# Altium PCB BigDriver.PcbDoc
Units mm, origin at the board's own origin, x right, y up, seen from the top; angles counter-clockwise.
Board outline 56.43 x 56.43 mm, 2 copper layers (Top Layer, Bottom Layer), stack 2.071 mm thick; 63 components, 58 nets, 245 pads, 152 vias.
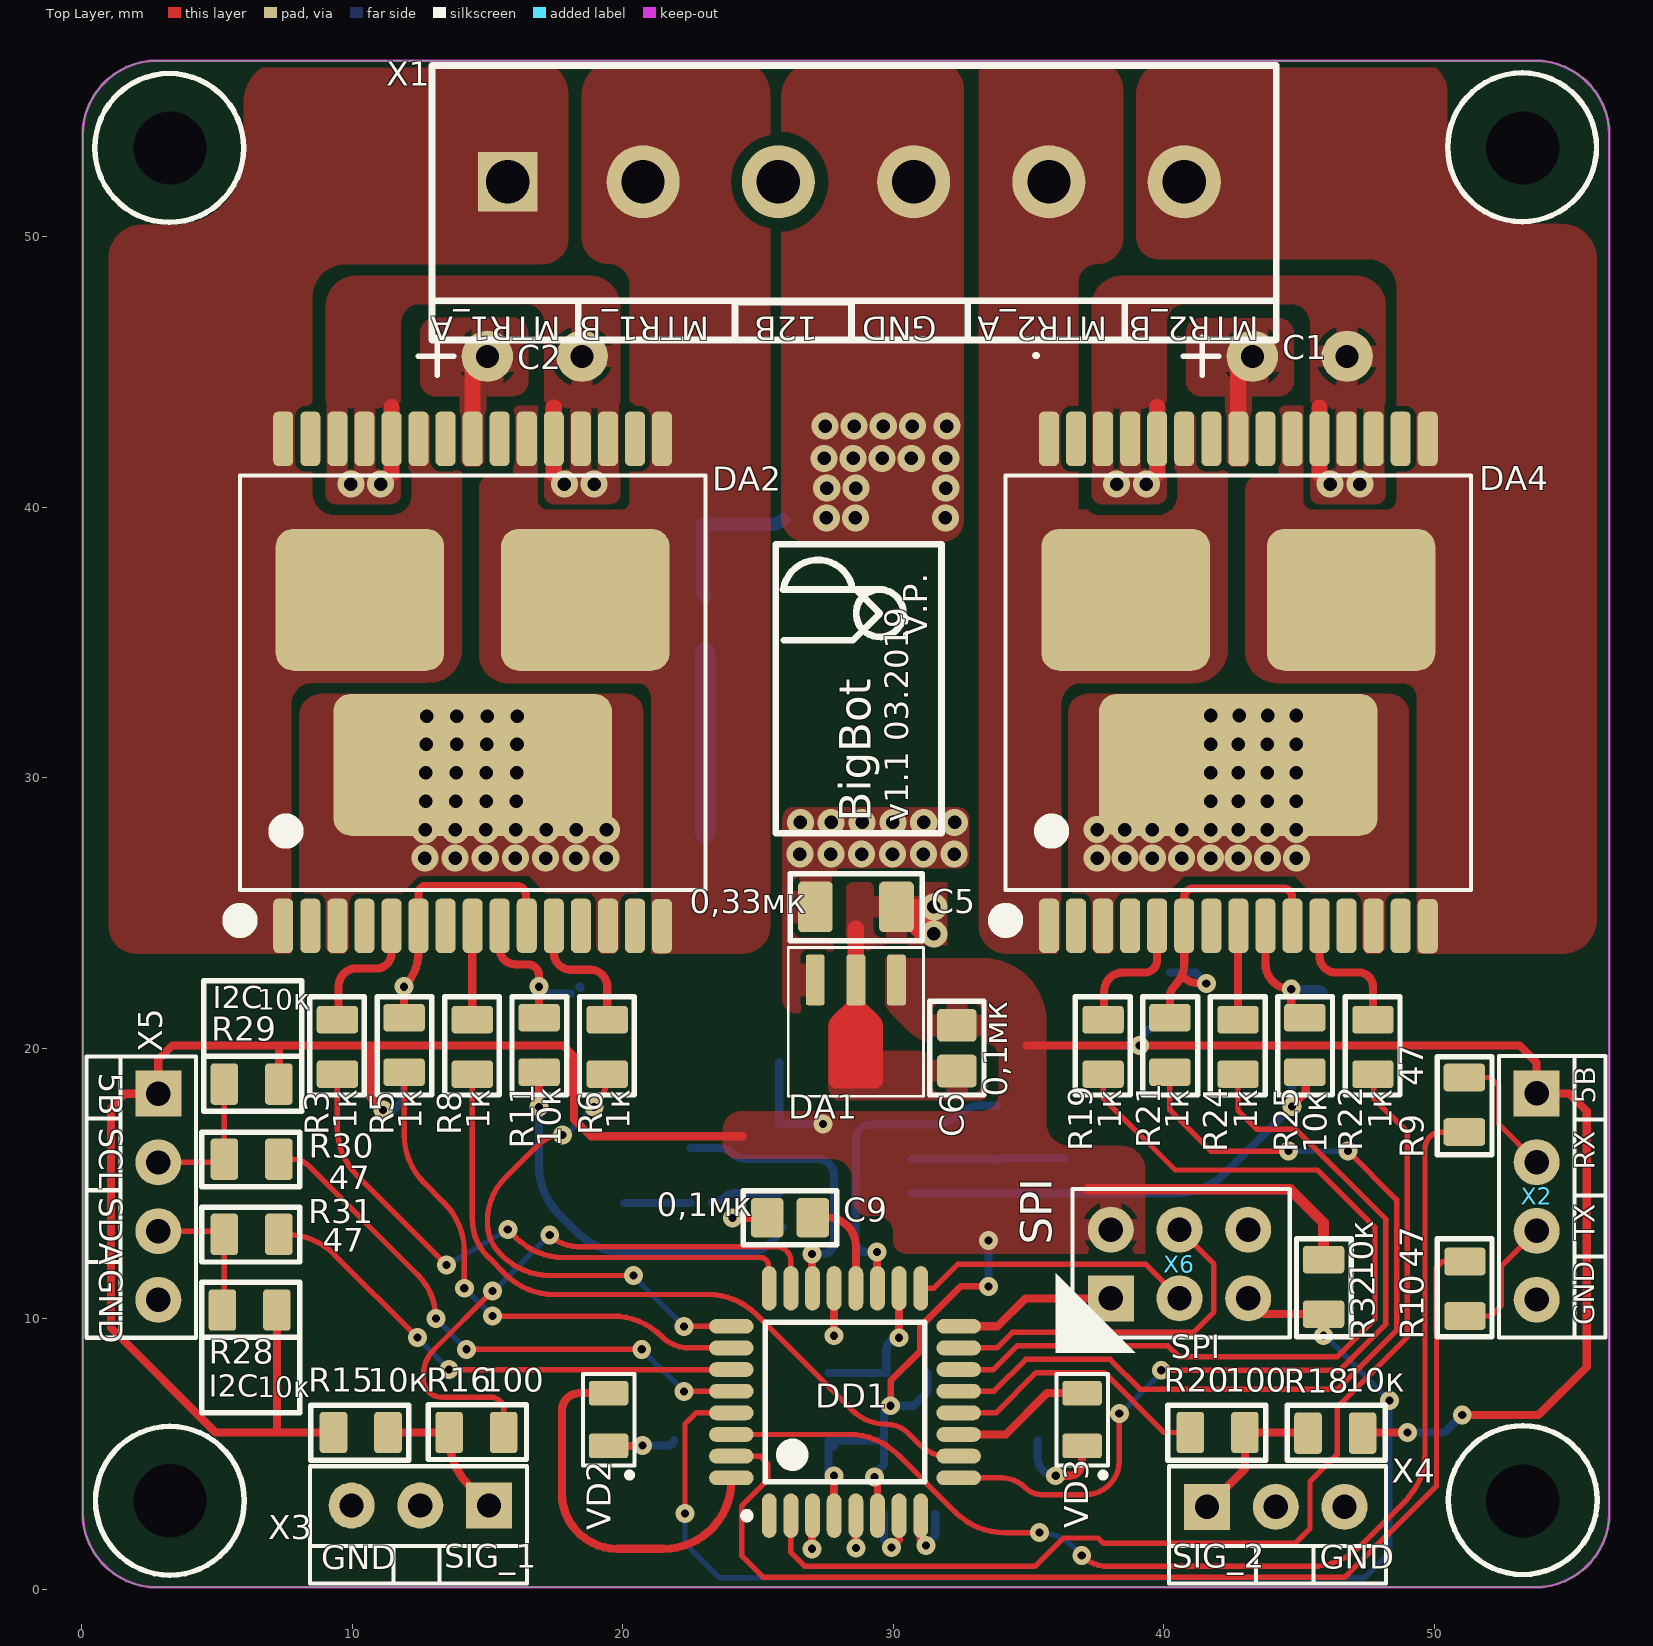
[diagram p0: Top Layer view]
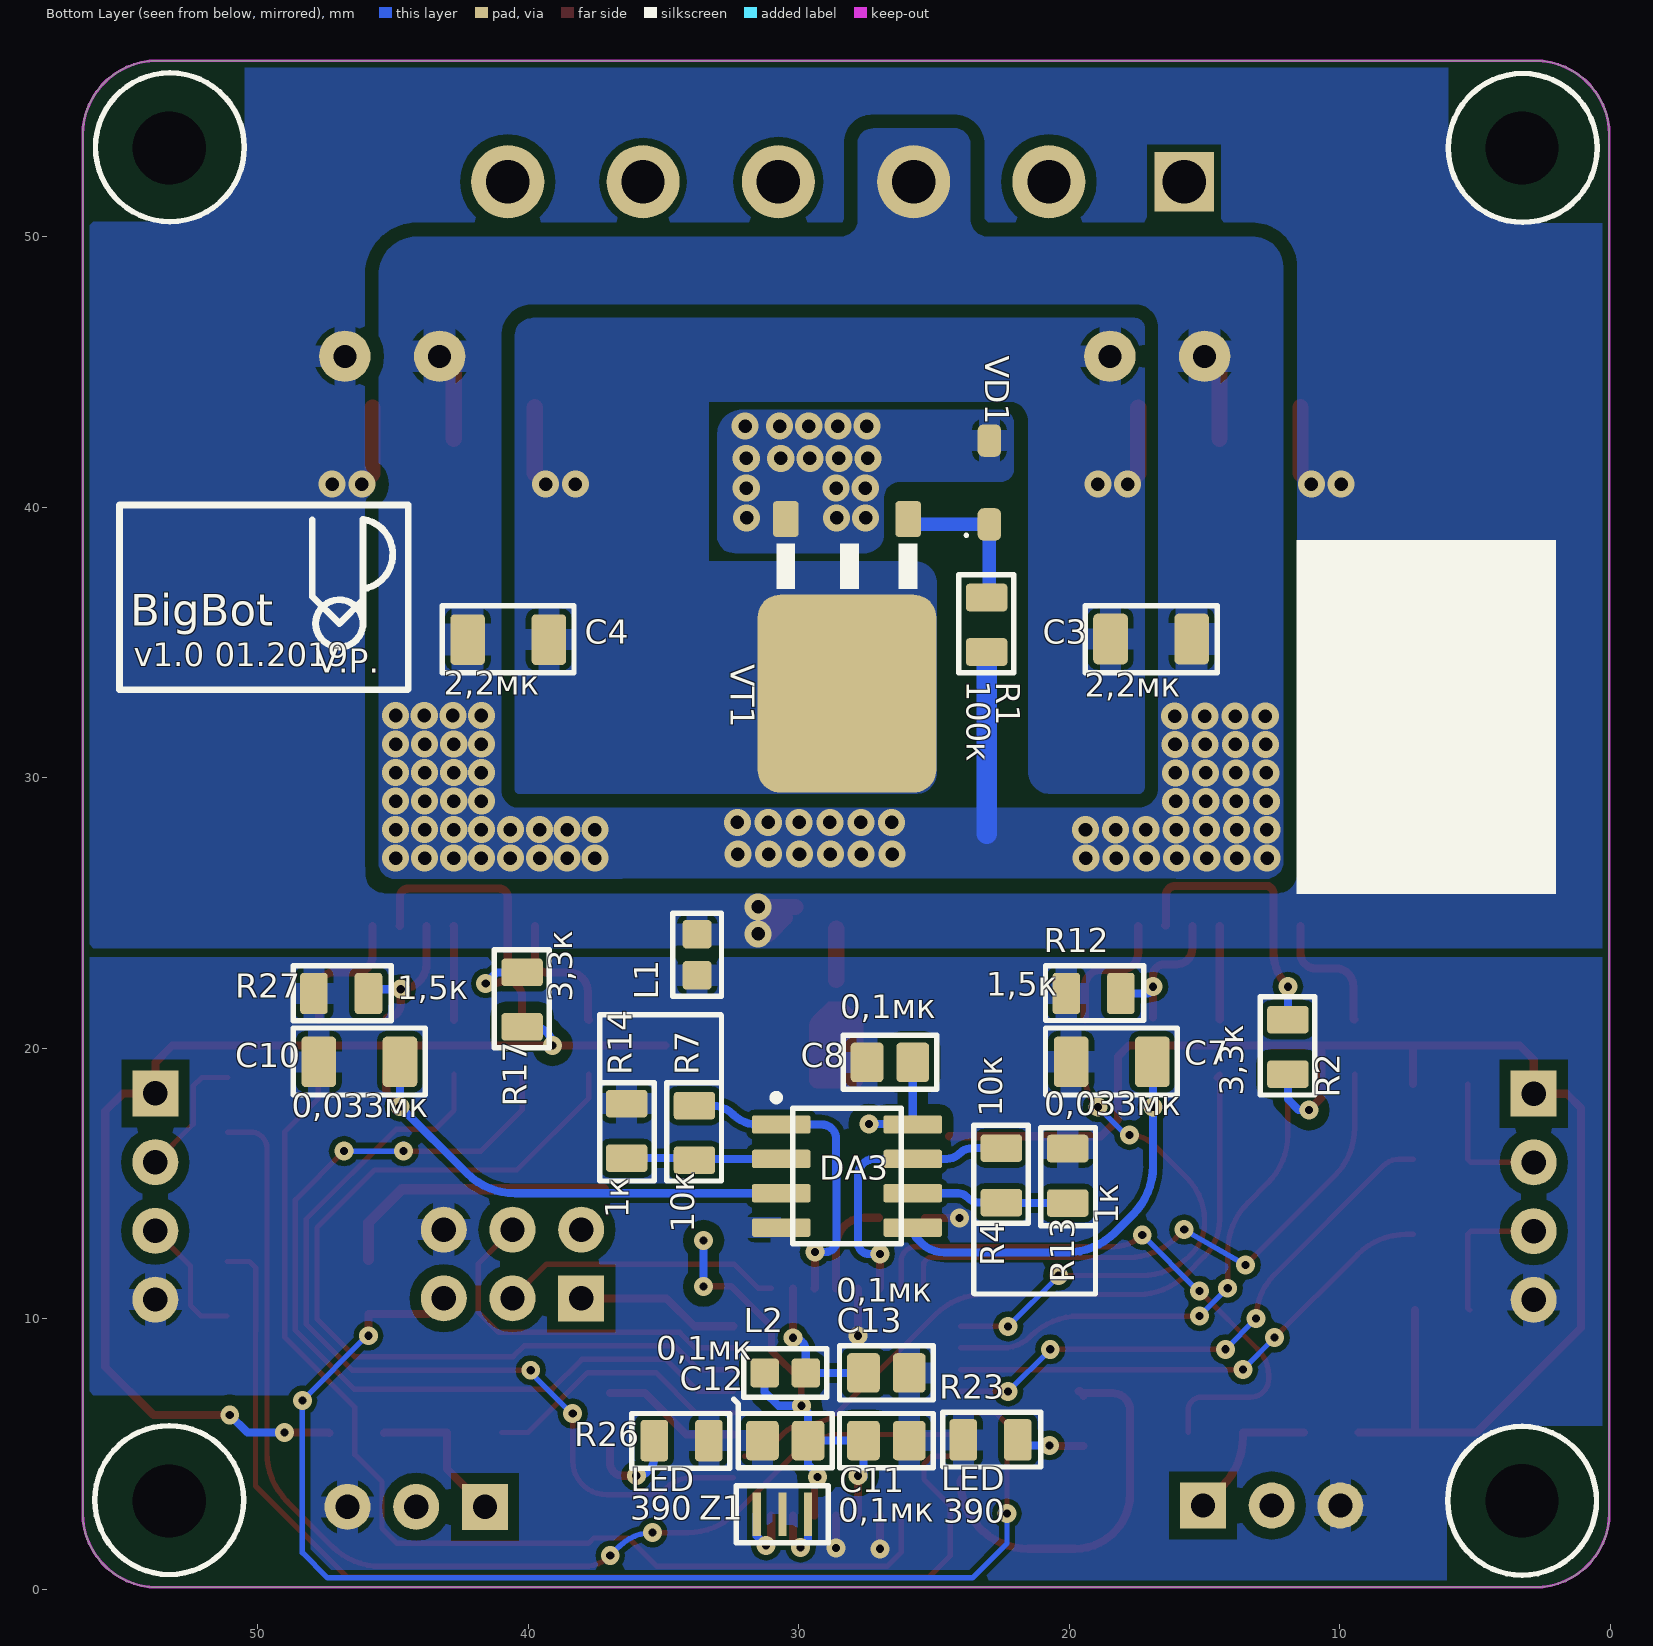
[diagram p1: Bottom Layer view, seen from below]

## Layer stack, top to bottom
Top Solder: solder mask 0.0102, Solder Resist, Dk 3.5
Top Layer: signal copper 0.0356
Dielectric 1: dielectric 2, FR-4, Dk 4.8
Bottom Layer: signal copper 0.0356
Bottom Solder: solder mask 0.0102, Solder Resist, Dk 3.5

## Board outline
0.038,2.826 0.038,53.75 0.037,53.75 cw(c2.788,53.75) 2.788,56.501 53.711,56.5 53.711,56.501 cw(c53.711,53.75) 56.462,53.75 56.462,2.826 cw(c53.711,2.826) 53.711,0.075 2.788,0.075 cw(c2.788,2.826)

## Design rules (kind name [scope] priority, off if disabled: settings)
Clearance Clearance_12B_3 [InNet('NetDA4_1') vs InNet('UGND')] p1: gap=0.5
Clearance Clearance_12B_2 [InNet('12B') vs InNet('UGND')] p2: gap=0.5
Clearance Clearance_5B [InNet('5B') vs InNet('DGND')] p3: gap=0.4 except(0.2: SMDPad-SMDPad; 0.3: Arc-Arc Arc-Track Arc-SMDPad Track-Track Track-SMDPad)
Clearance Clearance_5B_1 [InNet('5B') vs InNet('PGND')] p4: gap=0.4 except(0.2: SMDPad-SMDPad; 0.3: Arc-Arc Arc-Track Arc-SMDPad Track-Track Track-SMDPad)
Clearance Clearance_12B [InNet('12B') vs InNet('PGND')] p5: gap=0.5
Clearance Clearance_12B_1 [InNet('12B') vs InNet('DGND')] p6: gap=0.5
Clearance Clearance_ChannelMotor [InNet('NetDA2_1') vs InNet('PGND')] p7: gap=0.26 except(0.3: SMDPad-Fill SMDPad-Poly SMDPad-Region; 0.4: Via-Fill Via-Poly Via-Region Fill-Fill Fill-Poly Fill-Region Poly-Poly Poly-Region Region-Region)
Clearance Clearance_ChannelMotor_1 [InNet('NetDA4_1') vs InNet('PGND')] p8: gap=0.26 except(0.3: SMDPad-Fill SMDPad-Poly SMDPad-Region; 0.4: Via-Fill Via-Poly Via-Region Fill-Fill Fill-Poly Fill-Region Poly-Poly Poly-Region Region-Region)
Clearance Clearance_Grounds [InNet('PGND') vs InNet('DGND')] p9: gap=0.3
Clearance Clearance_Grounds_1 [InNet('PGND') vs InNet('UGND')] p10: gap=0.3
Clearance [All] p11: gap=0.2 except(0.3: Arc-THPad Track-THPad; 0.4: SMDPad-THPad THPad-THPad THPad-Via THPad-Fill THPad-Poly THPad-Region THPad-Text)
HoleSize [All] p1: absolutevalues=TRUE maxlimit=5 minlimit=0.025 maxpercent=80.000 minpercent=20.000
MinimumSolderMaskSliver [All] p1: minsoldermaskwidth=0.01
PolygonConnect PolygonConnect_1 [HasFootprint('MultiPowerSO-30') vs InNet('NetDA4_1')] p1: connectstyle=Direct reliefconductorwidth=0.254 reliefentries=4 polygonreliefangle="90 Angle" airgapwidth=0.254
PolygonConnect PolygonConnect_2 [HasFootprint('MultiPowerSO-30') vs InNet('NetDA2_5')] p2: connectstyle=Direct reliefconductorwidth=0.254 reliefentries=4 polygonreliefangle="90 Angle" airgapwidth=0.254
PolygonConnect PolygonConnectPGNDPad_4 [HasFootprint('MultiPowerSO-30') vs InNet('NetDA2_15')] p3: connectstyle=Direct reliefconductorwidth=5 reliefentries=4 polygonreliefangle="90 Angle" airgapwidth=0.3
PolygonConnect PolygonConnectPGNDPad_3 [HasFootprint('MultiPowerSO-30') vs InNet('NetDA2_1')] p4: connectstyle=Direct reliefconductorwidth=5 reliefentries=4 polygonreliefangle="90 Angle" airgapwidth=0.3
PolygonConnect PolygonConnectPGNDPad_6 [HasFootprint('MultiPowerSO-30') vs InNet('NetDA4_15')] p5: connectstyle=Direct reliefconductorwidth=5 reliefentries=4 polygonreliefangle="90 Angle" airgapwidth=0.3
PolygonConnect PolygonConnectPGNDPad [HasFootprint('MultiPowerSO-30') vs InNet('12B')] p6: connectstyle=Direct reliefconductorwidth=5 reliefentries=4 polygonreliefangle="90 Angle" airgapwidth=0.3
PolygonConnect PolygonConnectPGNDPad_5 [HasFootprint('SOT-89-3') vs InNet('5B')] p7: connectstyle=Direct reliefconductorwidth=5 reliefentries=4 polygonreliefangle="90 Angle" airgapwidth=0.3
PolygonConnect PolygonConnectPGNDPad_2 [HasFootprint('D2PAK') vs InNet('UGND')] p8: connectstyle=Relief reliefconductorwidth=5 reliefentries=4 polygonreliefangle="90 Angle" airgapwidth=0.3
PolygonConnect PolygonConnect12ВPad [HasFootprint('TERMINAL-6WAY-5MM')] p9: connectstyle=Direct reliefconductorwidth=5 reliefentries=4 polygonreliefangle="90 Angle" airgapwidth=0.3
PolygonConnect PolygonConnectPGNDPad_7 [HasFootprint('DPAK') vs InNet('UGND')] p10: connectstyle=Direct reliefconductorwidth=5 reliefentries=4 polygonreliefangle="90 Angle" airgapwidth=0.3
PolygonConnect PolygonConnectPGNDPad_1 [HasFootprint('DPAK') vs InNet('PGND')] p11: connectstyle=Direct reliefconductorwidth=2 reliefentries=4 polygonreliefangle="90 Angle" airgapwidth=0.3
PolygonConnect PolygonConnectVia [IsVia] p12: connectstyle=Direct reliefconductorwidth=0.6 reliefentries=4 polygonreliefangle="90 Angle" airgapwidth=0.2
PolygonConnect PolygonConnect12B [InNet('12B')] p13: connectstyle=Relief reliefconductorwidth=1.2 reliefentries=4 polygonreliefangle="90 Angle" airgapwidth=0.2
PolygonConnect PolygonConnectPGND [InNet('PGND')] p14: connectstyle=Relief reliefconductorwidth=0.8 reliefentries=4 polygonreliefangle="90 Angle" airgapwidth=0.2
PolygonConnect [All] p15: connectstyle=Relief reliefconductorwidth=0.8 reliefentries=4 polygonreliefangle="90 Angle" airgapwidth=0.2
RoutingVias [All] p1: holewidth=0.711 width=1.27 viastyle="Through Hole" minholewidth=0.711 minwidth=1.27 maxholewidth=0.711 maxwidth=1.27
ShortCircuit [All] p1: allowed=TRUE
SilkToSilkClearance [All] p1: silktosilkclearance=0
SilkToSolderMaskClearance [IsPad] p1: minsilkscreentomaskgap=0 clearancetoexposedcopper=TRUE
SolderMaskExpansion [All] p1: expansion=0.102
Width [All] p1: maxlimit=7 minlimit=0.1 preferedwidth=0.3
25 further rules are at their usual default settings.

## Components (designator, comment, footprint, x,y, rotation, side; value= is the part's Value field where it differs from the comment)
C1 "Capacitor_pol" k50-35(8x11.5)_MIRROR 45.02,46.125 r90 top
C2 "Capacitor_pol" K50-35(8X11.5)_MIRROR 16.745,46.125 r90 top
C3 "Capacitor" C1206 17,35.102 r0 bottom
C4 "Capacitor" C1206 40.704,35.127 r180 bottom
C5 "Capacitor" C1206 28.588,25.2 r180 top
C6 "Capacitor" C0805 32.35,20.004 r90 top
C7 "Capacitor" C1206 18.4,19.524 r180 bottom
C8 "Capacitor" C0805 26.627,19.479 r0 bottom
C9 "Capacitor" C0805 26.18,13.737 r180 top
C10 "Capacitor" C1206 46.206,19.522 r180 bottom
C11 "Capacitor" C0805 26.759,5.5 r180 bottom
C12 "Capacitor" C0805 30.495,5.5 r0 bottom
C13 "Capacitor" C0805 26.759,8 r180 bottom
DA1 "L78L05ABUTR" SOT-89-3 28.613,22.524 r180 top
DA2 "VNH2SP30-E" MultiPowerSO-30 14.45,33.525 r0 top
DA3 "LMV358IDR" SO8 28.212,15.275 r180 bottom
DA4 "VNH2SP30-E" MultiPowerSO-30 42.75,33.525 r0 top
DD1 "ATmega328P-AU" TQFP-32 28.212,6.925 r90 top
L1 "Inductor" L0603 33.751,23.455 r270 bottom
L2 "Inductor" L0603 30.495,8 r180 bottom
R1 "Resistor_0,125Вт" R0805 23.051,35.652 r90 bottom
R2 "Resistor_0,125Вт" R0805 11.919,20.049 r90 bottom
R3 "Resistor_0,125Вт" R0805 9.45,20.049 r90 top
R4 "Resistor_0,125Вт" R0805 22.509,15.3 r90 bottom
R5 "Resistor_0,125Вт" R0805 11.919,20.124 r270 top
R6 "Resistor_0,125Вт" R0805 19.425,20.049 r90 top
R7 "Resistor_0,125Вт" R0805 33.851,16.87 r90 bottom
R8 "Resistor_0,125Вт" R0805 14.438,20.049 r90 top
R9 "Resistor_0,125Вт" R0805 51.1,17.911 r270 top
R10 "Resistor_0,125Вт" R0805 51.125,11.111 r90 top
R11 "Resistor_0,125Вт" R0805 16.906,20.124 r270 top
R12 "Resistor_0,125Вт" R0805 19.1,22.025 r180 bottom
R13 "Resistor_0,125Вт" R0805 20.055,15.286 r270 bottom
R14 "Resistor_0,125Вт" R0805 36.356,16.945 r270 bottom
R15 "Resistor_0,125Вт" R0805 10.316,5.8 r180 top
R16 "Resistor_0,125Вт" R0805 14.591,5.8 r0 top
R17 "Resistor_0,125Вт" R0805 40.219,21.797 r90 bottom
R18 "Resistor_0,125Вт" R0805 46.333,5.775 r0 top
R19 "Resistor_0,125Вт" R0805 37.75,20.047 r90 top
R20 "Resistor_0,125Вт" R0805 41.983,5.8 r180 top
R21 "Resistor_0,125Вт" R0805 40.219,20.122 r270 top
R22 "Resistor_0,125Вт" R0805 47.725,20.047 r90 top
R23 "Resistor_0,125Вт" R0805 22.905,5.525 r180 bottom
R24 "Resistor_0,125Вт" R0805 42.738,20.047 r90 top
R25 "Resistor_0,125Вт" R0805 45.206,20.122 r270 top
R26 "Resistor_0,125Вт" R0805 34.325,5.5 r0 bottom
R27 "Resistor_0,125Вт" R0805 46.906,22.024 r180 bottom
R28 "Resistor_0,125Вт" R0805 6.208,10.325 r0 top
R29 "Resistor_0,125Вт" R0805 6.283,18.675 r0 top
R30 "Resistor_0,125Вт" R0805 6.283,15.9 r180 top
R31 "Resistor_0,125Вт" R0805 6.283,13.125 r180 top
R32 "Resistor_0,125Вт" R0805 45.9,11.181 r270 top
VD1 "DiodeZener" SOD-123 22.95,40.909 r90 bottom
VD2 "LED" L_0805 19.475,6.277 r90 top
VD3 "LED" L_0805 36.975,6.277 r90 top
VT1 "N-MOSFET" DPAK 28.212,33.26 r0 bottom
X1 "" TERMINAL-6WAY-5MM 28.25,52.025 r0 top locked
X2 "Header_4_plg" PLS-4 53.776,14.461 r0 top
X3 "Header_3_plg" PLS-3 12.516,3.101 r270 top
X4 "Header_3_plg" PLS-3 44.133,3.051 r90 top
X5 "Header_4_plg" PLS-4 2.833,14.45 r0 top
X6 "ISP MKII" PLS2-6 40.675,12.031 r90 top
Z1 "QuartzWithCaps" CSTCE 30.6,2.775 r180 bottom

## Footprints (in the part's own frame and the unit in brackets; to place one, negate y for a bottom-side part, rotate by r counter-clockwise, add the part's x,y. Pads: shape width x height; smd on the part's side, far side on the other; paste and mask are expansions set on the pad)
C0805 [mm]
  rrect25% 1.21x1.46 smd paste-5: 1(-0.845,0) 2(0.845,0)
  silkscreen extent -1.73,-1 1.73,1, body extent -1,-0.62 1,0.63, height 0.78
C1206 [mm]
  rrect25% 1.28x1.87 smd: 1(-1.528,-0.024) 2(1.472,-0.024)
  silkscreen extent -2.47,-1.25 2.4,1.23, body extent -1.6,-0.85 1.6,0.85, height 1.75
CSTCE [mm]
  rect 0.3x1.6 smd: 1(-0.95,0) 2(0,0) 3(0.95,0)
  silkscreen extent -1.7,-1.05 1.7,1.05, body extent -1.6,-0.65 1.6,0.65, height 1.02
DPAK [mil]
  rrect25% 37x52 smd: 1(-89,-248) 3(89,-248)
  rrect25% 260x288 smd: 2(0,6)
  silkscreen extent -102,-213 102,-146, body extent -193,-266 128,108, height 91
k50-35(8x11.5)_MIRROR [mm]
  round 1.9 hole 0.85 mask+0.102: 1(-0.55,1.75)
  round 1.9 hole 0.85: 2(-0.55,-1.75)
  silkscreen extent -1.25,3 0.15,4.3, body extent -14.08,-4.03 -0.25,4.03, height 12.03
K50-35(8X11.5)_MIRROR [mm]
  round 1.9 hole 0.85 mask+0.102: 1(-0.55,1.75)
  round 1.9 hole 0.85: 2(-0.55,-1.75)
  silkscreen extent -1.25,3 0.15,4.3, body extent -14.08,-4.03 -0.25,4.03, height 12.03
L0603 [mm]
  rrect25% 1.05x1.07 smd paste-5: 1(-0.76,0) 2(0.76,0)
  silkscreen extent -1.53,-0.9 1.53,0.9, body extent -0.8,-0.4 0.8,0.4, height 0.8
L_0805 [mm] "SMD LED LAMP"
  rrect25% 0.91x1.46 smd: 1(-0.975,0) 2(0.975,0)
  silkscreen extent -2.15,-0.95 1.68,0.95, body extent -1.01,-0.62 1.01,0.63, height 1.1
MultiPowerSO-30 [mm]
  rrect50% 0.74x2.01 smd: 1(-7,-9) 2(-6,-9) 3(-5,-9) 4(-4,-9) 5(-3,-9) 6(-2,-9) 7(-1,-9) 8(0,-9) 9(1,-9) 10(2,-8.995) 11(3,-9) 12(4,-9) 13(5,-9) 14(6,-9) 15(7,-9.01) 16(7,9) 17(6,9) 18(5,9) 19(4,9) 20(3,9) 21(2,9) 22(1,9) 23(0,9) 24(-1,9) 25(-2,9) 26(-3,9) 27(-4,9) 28(-5,9) 29(-6,9) 30(-7,9)
  rrect25% 10.3x5.25 smd: 3(0,-3.05)
  rrect25% 6.23x5.25 smd: 16(4.165,3.05) 30(-4.165,3.05)
  silkscreen extent -8.75,-8.95 8.6,7.65, body extent -8.6,-9.6 8.6,9.4, height 2.37
PLS2-6 [mm] "Разъем для программатора ISP"
  rect 1.7x1.7 hole 0.9: 1(-1.275,2.64)
  round 1.7 hole 0.9: 2(1.265,2.64) 3(-1.275,0.1) 4(1.265,0.1) 5(-1.275,-2.44) 6(1.265,-2.44)
  silkscreen extent -2.73,-3.98 2.78,4.05, body extent -2.54,-3.81 2.54,3.81, height 8.54
PLS-3 [mm] "Разъем для программатора ISP"
  rect 1.7x1.7 hole 0.9: 1(0,2.54)
  round 1.7 hole 0.9: 2(0,0) 3(0,-2.54)
  silkscreen extent -1.45,-4.08 1.5,3.95, body extent -1.26,-3.91 1.27,3.71, height 8.54
PLS-4 [mm]
  rect 1.7x1.7 hole 0.9: 1(0,3.87)
  round 1.7 hole 0.9: 2(0,1.33) 3(0,-1.21)
  round 1.7 hole 0.9 mask+0.102: 4(0,-3.75)
  silkscreen extent -1.4,-5.15 1.4,5.25, body extent -1.27,-5.02 1.27,5.14, height 9.5
R0805 [mm] "Chip Resistor, 2-Leads, Body 2,10x1,30mm, IPC Medium Density"
  rrect25% 1.02x1.53 smd paste-5: 1(-1.007,0) 2(1.008,0)
  silkscreen extent -1.77,-1 1.85,1.02, body extent -1.1,-0.7 1.1,0.7, height 0.55
SO8 [mm]
  rrect25% 2.17x0.68 smd: 1(-2.43,1.905) 2(-2.43,0.635) 3(-2.43,-0.635) 4(-2.43,-1.905) 5(2.43,-1.905) 6(2.43,-0.635) 7(2.43,0.635) 8(2.43,1.905)
  silkscreen extent -2.74,-2.5 2,3.02, body extent -3,-2.54 3,2.54, height 1.7
SOD-123 [mm]
  rrect50% 1.2x0.87 smd: 1(-1.55,0) 2(1.55,0)
  silkscreen extent -2,0.8 -1.9,0.9, body extent -1.85,-0.8 1.85,0.8, height 1.27
SOT-89-3 [mm]
  rrect25% 0.7x1.87 smd: 1(-1.5,0) 2(0,0) 3(1.5,0)
  Top Layer region: -0.3,0.8 -0.829,1.329 -0.956,1.518 -1,1.741 -1,1.741 -1,3.7 -0.96,3.85 -0.85,3.96 -0.7,4 -0.7,4 0.7,4 0.85,3.96 0.96,3.85 1,3.7 1,3.7 1,1.741 0.956,1.518 0.829,1.329 0.829,1.329 0.3,0.8
  silkscreen extent -2.5,-1.2 2.5,4.3, body extent -2.25,-0.5 2.25,3.75, height 1.54
TERMINAL-6WAY-5MM [mm]
  rect 2.2x2.2 hole 1.6: 1(-12.5,0)
  round 2.7 hole 1.6: 2(-7.5,0) 3(-2.5,0) 4(2.5,0) 5(7.5,0) 6(12.5,0)
  silkscreen extent -15.3,-4.4 15.9,4.3, body extent -14.98,-4.1 15.58,4.05, height 10
TQFP-32 [mm] "Thin QFP, 32-Leads, Body 7x7mm, Pitch 0.8mm, IPC Medium Density"
  oval 1.65x0.55 smd: 1(-4.2,2.8) 2(-4.2,2) 3(-4.2,1.2) 4(-4.2,0.4) 5(-4.2,-0.4) 6(-4.2,-1.2) 7(-4.2,-2) 8(-4.2,-2.8) 17(4.2,-2.8) 18(4.2,-2) 19(4.2,-1.2) 20(4.2,-0.4) 21(4.2,0.4) 22(4.2,1.2) 23(4.2,2) 24(4.2,2.8)
  oval 0.55x1.65 smd: 9(-2.8,-4.2) 10(-2,-4.2) 11(-1.2,-4.2) 12(-0.4,-4.2) 13(0.4,-4.2) 14(1.2,-4.2) 15(2,-4.2) 16(2.8,-4.2) 25(2.8,4.2) 26(2,4.2) 27(1.2,4.2) 28(0.4,4.2) 29(-0.4,4.2) 30(-1.2,4.2) 31(-2,4.2) 32(-2.8,4.2)
  silkscreen extent -4.32,-2.95 2.95,3.75, body extent -4.6,-4.6 4.6,4.6, height 1.2

## Part data
C1 C2: library part cap221, "Конденсатор полярный"
C3 C4: library part cap205, "Конденсатор"
C5: library part cap183, "Конденсатор"
C6: library part cap161, "Конденсатор"
C7 C10: library part cap207, "Конденсатор"
C8 C9 C11 C12 C13: library part cap162, "Конденсатор"
DA1: library part pwr6, "Cтабилизатор напряжения (+5В; 0.1А), 4%, (-40...+125C)"
DA2 DA4: library part driver9, "Automotive fully integrated H-bridge motor driver"
DA3: library part amp2, "LOW-VOLTAGE RAIL-TO-RAIL OUTPUT OPERATIONAL AMPLIFIERS"
DD1: library part microcont1, "Микроконтроллер 8-Бит, picoPower, AVR, 20МГц, 32КБ Flash"
L1 L2: library part ind0, "EMI Suppression Filter"
R1: library part res121, "Резистор"
R2 R3 R4 R5 R6 R7 R8 R11 R12 R15 R17 R18 R19 R21 R22 R24 R25 R27 R28 R29 R32: library part res97, "Резистор"
R9 R10 R30 R31: library part res41, "Резистор"
R13 R14: library part res73, "Резистор"
R16 R20: library part res49, "Резистор"
R23 R26: library part res63, "Резистор"
VD1: library part SMF13A, "Cтабилитрон (лавинный выпрямительный диод) односторонний"
VD2 VD3: library part diode5, "Светодиод"
VT1: library part trans9
X1: library part connect11, "POWER"
X2 X5: library part connect14, "Разъем - 4 конт. вилка"
X3 X4: library part connect33, "Разъем - 3 конт. вилка"
X6: library part connect40, "Разъем - 6 конт. вилка"
Z1: library part crystal5, "Кварцевый резорнатор со встроенными нагрузочными конденсаторами"

## Free pads (board coordinates)
  round 0 hole 2.7 unplated: ""(3.262,53.275) ""(3.262,3.275) ""(53.262,53.275) ""(53.262,3.275)

## Via types
v1: diameter 1, hole 0.5, Top Layer to Bottom Layer, tented bottom, 70 vias
v2: diameter 0.7, hole 0.3, Top Layer to Bottom Layer, tented both sides, 52 vias
v3: diameter 1, hole 0.5, Top Layer to Bottom Layer, tented both sides, 30 vias

## Nets (pads, with @x,y where several pads share a name; then routed paths per layer and width w, separated by ;. In a path a pad name is that pad's centre, name@x,y a point inside that pad or via, vN(x,y) a via of type N, cw(c..) or ccw(c..) an arc to the next point about the centre after c; other vN are vias at no path point)
5B: C6.2 C8.1 C11.1 C12.1 DA1.1 DA3.8 DD1.4 DD1.6 L2.1 R2.1 R15.2 R17.1 R18.2 R28.2 R29.2 R32.1 X2.1 X5.1 X6.2 | length 133.6
  Top Layer w0.25: v2(29.3,4.16) 29.404,4.16 29.412,4.152 DD1.6 ; v2(29.9,6.787) 29.9,7.711 31,8.811 31,9.711 32.489,11.2 v2(33.511,11.2)
  Top Layer w0.3: R28.2 7.215,5.8 ; R29.2 7.29,20.1 ; R15.2 7.215,5.8 ; v2(11.141,17.716) 10.679,18.178 10.679,20.1 ; 24.432,16.748 18.824,16.748 18.2,17.372 18.2,19.698 17.798,20.1 10.679,20.1 ; v2(27.8,4.2) 27.8,2.738 DD1.4 ; DD1.6 DD1.6@29.425,2.725 ; 34.92,20.1 v2(39.1,20.1) 53.15,20.1 53.776,19.474 X2.1 54.969,18.331 55.625,17.675 55.625,8.225 53.85,6.45 v2(51.025,6.45) ; R18.2 47.366,5.8 v2(49,5.8) ; 7.215,5.8 4.95,5.8 1.082,9.668 1.082,17.79 1.612,18.32 X5.1 2.833,19.583 3.35,20.1 7.29,20.1 ; 7.29,20.1 10.679,20.1
  Top Layer w0.4: 37.2,14.79 44.66,14.79 45.9,13.55 R32.1
  Bottom Layer w0.3: v2(11.141,17.716) 11.52,17.716 11.919,18.115 R2.1 ; DA3.8 C8.1 ; DA3.8@25.803,17.2 v2(27.4,17.2) ; v2(27.8,4.2) 27.671,4.2 27.604,4.133 C11.1 ; C11.1@27.812,5.292 ccw(c27.604,5.292) C11.1 ; v2(29.3,4.16) 29.3,4.265 29.65,4.615 C12.1 ; L2.1 31.255,7.3 30.742,6.787 v2(29.9,6.787) 29.65,6.537 C12.1 ; v2(33.511,11.2) v2(33.511,12.9) ; v2(39.1,20.1) cw(c39.79,20.1) 39.79,20.79 R17.1 ; v2(49,5.8) 50.375,5.8 v2(51.025,6.45) ; C11.1 C12.1
12B: C1.1 C2.1 C3.1 C4.1 C5.2 DA1.3 DA2.3 DA2.13 DA2.23 DA4.3 DA4.13 DA4.23 R1.1 X1.3 | length 11.7
  Top Layer w0.6: DA2.23 C2.1@14.45,45 ; DA4.23 C1.1@42.75,44.999
  Bottom Layer w0.75: 23.051,27.921 R1.1
  other v1: 12.683,27.026 13.8,27.026 14.917,27.026 16.033,27.026 17.15,27.026 18.267,27.026 19.383,27.026 37.53,27.024 38.553,27.024 39.577,27.024 40.65,27.024 41.723,27.024 42.747,27.024 43.82,27.024 44.893,27.024 12.698,28.076 13.814,28.076 14.931,28.076 16.048,28.076 17.164,28.076 18.281,28.076 19.398,28.076 37.53,28.079 38.553,28.079 39.577,28.079 40.65,28.079 41.723,28.079 42.747,28.079 43.82,28.079 44.893,28.079 12.712,29.126 13.829,29.126 14.945,29.126 16.062,29.126 41.723,29.133 42.747,29.133 43.82,29.133 44.893,29.133 12.726,30.177 13.843,30.177 14.96,30.177 16.076,30.177 41.723,30.188 42.747,30.188 43.82,30.188 44.893,30.188 12.741,31.227 13.857,31.227 14.974,31.227 16.091,31.227 41.723,31.243 42.747,31.243 43.82,31.243 44.893,31.243 12.755,32.277 13.872,32.277 14.988,32.277 16.105,32.277 41.723,32.298 42.78,32.298 43.837,32.298 44.893,32.298
  other v3: 26.548,27.175 27.688,27.175 28.828,27.175 29.968,27.175 31.108,27.175 32.248,27.175 26.563,28.35 27.703,28.35 28.843,28.35 29.983,28.35 31.123,28.35 32.263,28.35
CS_IN_1: C7.2 DA3.5 R11.2 | length 16.4
  Top Layer w0.3: v2(16.9,17.825) 16.9,19.116 R11.2
  Bottom Layer w0.3: C7.2 ccw(c16.928,19.472) 16.9,19.472 v2(16.9,17.825) 16.9,15.652 ccw(c19.44,15.652) 17.644,13.856 18.306,13.194 ccw(c20.102,14.99) 20.102,12.45 24.615,12.45 ccw(c24.615,13.645) 25.46,12.8 25.607,12.947 ccw(c25.184,13.37) DA3.5 DA3.5@25.92,13.37
CS_IN_2: C10.2 DA3.3 R25.2 | length 18.5
  Top Layer w0.3: R25.2@44.706,19.115 cw(c44.706,19.087) R25.2@44.734,19.087 ; v2(44.734,17.852) 45.241,18.358 R25.2@45.241,19.137
  Bottom Layer w0.3: DA3.3 40.471,14.64 ccw(c40.471,17.18) 42.267,15.384 v2(44.734,17.852) C10.2
CS_OUT_1: DA3.7 DD1.22 R4.2 | length 10.7
  Top Layer w0.3: v2(27,12.4) 27,11.131 DD1.22@27.005,11.125
  Bottom Layer w0.3: R4.2 23.575,16.308 cw(c23.575,15.619) 24.061,16.106 ccw(c24.534,16.579) 24.534,15.91 DA3.7 27.19,15.91 cw(c27.19,15.3) 27.8,15.3 27.8,12.8 cw(c27.4,12.8) 27.4,12.4 27.05,12.4 cw(c27.05,12.45) 27,12.45 v2@27.1,12.55
CS_OUT_2: DA3.1 DD1.19 R7.2 | length 11.9
  Top Layer w0.3: v2(29.4,12.475) 29.4,11.155 ccw(c29.443,11.155) DD1.19
  Bottom Layer w0.3: 28.6,15.275 28.6,12.875 ccw(c29,12.875) 29,12.475 v2(29.4,12.475) ; 28.612,15.275 28.612,16.647 cw(c29.146,16.647) 29.146,17.18 DA3.1 31.529,17.18 ccw(c31.529,18.43) 32.413,17.546 cw(c33.212,16.747) 33.212,17.877 R7.2
DGND: C7.1 C8.2 C9.2 C10.1 C11.2 C12.2 C13.2 DA3.4 DD1.3 DD1.5 DD1.21 L1.2 R12.1 R13.1 R14.1 R23.1 R26.1 R27.1 X2.4 X3.3 X4.3 X5.4 X6.6 Z1.2 | length 5.4
  Top Layer w0.3: v2(24.061,13.725) C9.2@25.323,13.725 ; v2(27,1.5) 27,2.713 DD1.3 ; v2(27.8,9.375) DD1.21@27.8,11.113 ; v2(28.612,1.525) DD1.5
EN_1: DD1.26 R5.2 | length 19.3
  Top Layer w0.2: R5.2 11.919,16.816 ccw(c14.459,16.816) 12.663,15.02 13.399,14.284 cw(c11.603,12.488) 14.143,12.488 v2(14.143,11.131) ; v2(15.189,10.1) 19.631,10.1 cw(c19.631,7.56) 21.428,9.356 ccw(c22.468,10.397) 22.468,8.925 DD1.26
  Bottom Layer w0.2: v2(14.143,11.131) 14.143,11.146 v2(15.189,10.1)
EN_2: DD1.13 R21.2 | length 34.3
  Top Layer w0.2: DD1.13 33.725,7.325 34.9,8.5 38.011,8.5 39.111,7.4 46.426,7.4 48.6,9.574 48.6,14.4 v2(46.8,16.2) ; R21.2 40.219,17.722 41.741,16.2 v2(44.6,16.2)
  Bottom Layer w0.2: v2@44.8,16.2 v2(46.8,16.2)
  Bottom Layer w0.3: v2(44.6,16.2) 44.6,16.4 v2@44.8,16.2
INA_1: DD1.24 R3.1 | length 21.8
  Top Layer w0.2: R3.1 9.45,17.074 ccw(c11.99,17.074) 10.194,15.278 v2(13.478,11.994) ; 16.037,13.009 ccw(c17.833,14.805) 17.833,12.265 25.078,12.265 cw(c25.078,11.957) 25.386,11.957 25.386,11.151 ccw(c25.412,11.151) DD1.24
  Bottom Layer w0.2: v2(13.478,11.994) v2(15.75,13.296)
INA_2: DD1.14 R19.1 | length 32.8
  Top Layer w0.2: DD1.14 33.698,8.125 34.573,9 40.15,9 40.55,8.6 46.415,8.6 47.8,9.985 47.8,13.367 45.667,15.5 40.419,15.5 37.75,18.169 R19.1
INB_1: DD1.25 R6.1 | length 18.5
  Top Layer w0.2: 17.22,11.6 17.324,11.6 ; v2(17.775,16.8) ccw(c17.775,15.516) 16.867,16.424 15.651,15.208 ccw(c17.221,13.637) 15,13.637 15,13.531 ccw(c16.592,13.531) 15.466,12.406 15.528,12.344 ccw(c17.324,14.14) 17.324,11.6 ; v2(18.939,17.825) ccw(c17.765,18.999) 19.425,18.999 R6.1 ; v2(20.4,11.6) 17.324,11.6 ; v2@22.264,9.725 DD1.25
  Bottom Layer w0.2: v2(17.775,16.8) 17.783,16.8 17.848,16.735 v2(18.939,17.825) ; v2(20.4,11.6) 20.4,11.574 v2(22.256,9.717)
INB_2: DD1.2 R22.1 | length 40.3
  Top Layer w0.2: DD1.2 26.212,1.368 26.731,0.85 35.232,0.85 36.282,1.9 37.572,1.9 37.772,1.7 44.844,1.7 45.4,2.256 45.4,3.983 46.4,4.983 46.4,6.73 49,9.33 49,16.9 47.751,18.149 R22.1@47.751,19.04
MISO: DD1.16 X6.1 | length 6
  Top Layer w0.3: DD1.16 33.853,9.725 34.884,10.756 X6.1
MOSI: DD1.15 X6.4 | length 13.9
  Top Layer w0.2: DD1.15 33.825,8.925 34.4,9.5 41.087,9.5 41.843,10.256 41.843,12.022 40.569,13.296 X6.4@40.175,13.296
NetC9_1: C9.1 DD1.20 | length 3.8
  Top Layer w0.3: C9.1 27.575,13.737 cw(c27.575,12.7) 28.612,12.7 DD1.20
NetC13_1: C13.1 DD1.18 L2.2 | length 5.5
  Top Layer w0.3: v2(30.212,9.3) DD1.18
  Bottom Layer w0.3: C13.1 L2.2 29.735,8.822 cw(c30.212,8.822) v2(30.212,9.3)
NetDA2_1: DA2.1 DA2.25 DA2.30 X1.1
NetDA2_5: DA2.5 R3.2 | length 4.9
  Top Layer w0.3: R3.2 ccw(c9.45,21.106) 9.5,21.106 9.5,22.3 cw(c10.15,22.3) 10.15,22.95 10.9,22.95 ccw(c10.9,23.5) 11.45,23.5 DA2.5
NetDA2_6: DA2.6 DA2.10 R2.2 R5.1 | length 11.4
  Top Layer w0.3: R5.1 v2(11.919,22.275) ccw(c10.636,23.558) 12.45,23.558 DA2.6 12.45,25.724 cw(c12.726,25.724) 12.726,26 16.081,26 cw(c16.081,25.664) 16.416,25.664 16.416,24.564 ccw(c16.45,24.564) DA2.10
  Bottom Layer w0.3: R2.2 v2(11.919,22.275)
NetDA2_8: DA2.8 R8.2 | length 3.5
  Top Layer w0.3: R8.2 14.438,24.512 DA2.8
NetDA2_9: DA2.9 R11.1 R12.2 | length 5.8
  Top Layer w0.3: DA2.9 15.45,23.678 ccw(c16.028,23.678) 16.028,23.1 16.5,23.1 cw(c16.5,22.7) 16.9,22.7 v2(16.9,22.275) 16.9,21.137 R11.1
  Bottom Layer w0.3: v2(16.9,22.275) ccw(c17.15,22.275) 17.15,22.025 R12.2 ; R12.2@18.393,22.275 cw(c18.393,22.225) R12.2@18.443,22.225
NetDA2_11: DA2.11 R6.2 | length 4.9
  Top Layer w0.3: DA2.11 17.45,23.539 ccw(c18.089,23.539) 18.089,22.9 18.8,22.9 cw(c18.8,22.275) 19.425,22.275 R6.2
NetDA2_15: DA2.15 DA2.16 DA2.21 X1.2
NetDA3_2: DA3.2 R7.1 R14.2 | length 5.8
  Bottom Layer w0.3: DA3.2 33.803,15.91 cw(c33.803,15.862) R7.1 cw(c34.032,15.681) 34.032,15.937 R14.2
NetDA3_6: DA3.6 R4.1 R13.2 | length 5.1
  Bottom Layer w0.3: R13.2 22.475,14.278 ccw(c22.475,14.327) R4.1 ; 23.277,14.292 ccw(c23.277,15.001) 23.778,14.5 cw(c24.116,14.162) 24.116,14.64 DA3.6
NetDA4_1: DA4.1 DA4.25 DA4.30 X1.5
NetDA4_5: DA4.5 R19.2 | length 5
  Top Layer w0.3: R19.2 ccw(c37.75,21.095) 37.79,21.095 37.79,22.1 cw(c38.49,22.1) 38.49,22.8 39.288,22.8 ccw(c39.288,23.263) 39.75,23.263 DA4.5
NetDA4_6: DA4.6 DA4.10 R17.2 R21.1 | length 12.5
  Top Layer w0.3: R21.1@40.204,21.144 R21.1 40.219,21.882 cw(c40.81,21.882) 40.392,22.3 ccw(c39.527,23.165) 40.649,22.679 ; v2(41.565,22.4) 41.322,22.4 cw(c41.322,23.351) 40.649,22.679 ; DA4.10 44.734,24.529 44.734,25.6 ccw(c44.434,25.6) 44.434,25.9 41.062,25.9 ccw(c41.062,25.588) 40.75,25.588 DA4.6 40.75,23.165 cw(c39.527,23.165) 40.649,22.679
  Bottom Layer w0.3: R17.2 41.16,22.805 v2(41.565,22.4)
NetDA4_8: DA4.8 R24.2 | length 3.5
  Top Layer w0.3: R24.2 42.738,24.511 DA4.8
NetDA4_9: DA4.9 R25.1 R27.2 | length 5.6
  Top Layer w0.3: DA4.9 43.75,23.138 ccw(c44.706,23.138) v2(44.706,22.182) 44.706,21.63 ccw(c45.206,21.63) R25.1
  Bottom Layer w0.3: v2@44.706,22.243 v2(44.706,22.182) 45.741,22.182 cw(c45.741,22.024) R27.2
NetDA4_11: DA4.11 R22.2 | length 5
  Top Layer w0.3: DA4.11 45.75,23.4 ccw(c46.35,23.4) 46.35,22.8 47.2,22.8 cw(c47.2,22.275) 47.725,22.275 R22.2
NetDA4_15: DA4.15 DA4.16 DA4.21 X1.6
NetR1_2: R1.2 VD1.1 VT1.1 | length 5.8
  Bottom Layer w0.5: VT1.1 cw(c25.469,40.042) 25.469,39.359 VD1.1 22.95,36.904 ccw(c23.296,36.904) R1.2@23.05,36.661 ; R1.2@23.05,36.661 ccw(c23.296,36.904) R1.2 R1.2@23.05,36.661
NetR9_1: R9.1 X2.2 | length 4.8
  Top Layer w0.2: R9.1 52.057,18.919 52.376,18.6 52.376,17.191 X2.2
NetR10_1: R10.1 X2.3 | length 4.8
  Top Layer w0.2: R10.1 52.086,10.104 52.476,10.494 52.476,11.951 X2.3
NetR15_1: R15.1 R16.1 X3.1 | length 5.5
  Top Layer w0.3: R15.1 R16.1 13.584,5.626 ccw(c16.124,5.626) 14.327,3.83 X3.1
NetR18_1: R18.1 R20.1 X4.1 | length 5.7
  Top Layer w0.3: X4.1 42.991,4.449 R20.1 45.301,5.8 R18.1
NetR23_2: R23.2 VD2.1 | length 2.5
  Top Layer w0.3: VD2.1 20.702,5.302 ccw(c20.702,5.325) v2(20.725,5.325)
  Bottom Layer w0.3: v2(20.725,5.325) 21.698,5.325 ccw(c21.698,5.525) R23.2
NetR26_2: R26.2 VD3.1 | length 3.6
  Top Layer w0.3: v2(36,4.2) 36.5,4.2 ccw(c36.5,4.675) 36.975,4.675 VD3.1
  Bottom Layer w0.3: R26.2 35.332,4.868 ccw(c36,4.868) v2(36,4.2)
NetR28_1: R28.1 R31.2 X5.3 | length 5.3
  Top Layer w0.2: X5.3 5.16,13.24 R31.2 5.275,10.4 R28.1
NetR29_1: R29.1 R30.2 X5.2 | length 5.3
  Top Layer w0.2: X5.2 5.155,15.78 R30.2 R29.1
OSC1: DD1.7 Z1.3 | length 2.6
  Top Layer w0.3: v2(29.925,1.55) 30.212,1.837 DD1.7
  Bottom Layer w0.3: Z1.3 29.65,1.825 v2(29.925,1.55)
OSC2: DD1.8 Z1.1 | length 2.5
  Top Layer w0.3: DD1.8 31.012,1.814 v2(31.202,1.625)
  Bottom Layer w0.3: v2(31.202,1.625) 31.55,1.974 Z1.1
PGND: C1.2 C2.2 C3.2 C4.2 C5.1 C6.1 DA1.2 DA2.18 DA2.19 DA2.20 DA2.26 DA2.27 DA2.28 DA4.18 DA4.19 DA4.20 DA4.26 DA4.27 DA4.28 L1.1 VT1.2 | length 18.1
  Top Layer w0.6: v1(11.05,40.85) 11.45,41.25 DA2.26 11.45,43.694 ; 17.45,43.681 DA2.20 17.45,41.241 v1(17.841,40.85) ; DA1.2 28.613,24.42 ; C5.1 30.496,25.224 v3(31.495,24.225) 31.115,24.225 C5.1@30.516,24.824 ; C5.1@30.516,25.224 v3(31.5,25.224) v3@31.663,25.224 ; v1(39.35,40.849) 39.75,41.249 39.75,43.693 ; 45.75,43.68 45.75,41.24 v1(46.141,40.849)
  other v1: 38.25,40.849 47.241,40.849 9.95,40.85 18.941,40.85
PWM_1: DD1.10 R8.1 | length 26.7
  Top Layer w0.2: R8.1@14.568,18.911 R8.1 14.438,13.68 ccw(c16.395,13.68) 15.011,12.295 15.662,11.644 ccw(c17.458,13.44) 17.458,10.9 23.149,10.9 cw(c23.149,8.36) 24.945,10.156 28.474,6.627 ccw(c29.737,7.89) 29.737,6.103 cw(c29.737,4.935) 30.564,5.761 30.986,5.339 ccw(c31.985,6.338) DD1.10@31.985,4.925
PWM_2: DD1.9 R24.1 | length 32.2
  Top Layer w0.2: DD1.9 33.979,4.125 cw(c33.979,2.845) 34.884,3.75 ccw(c35.488,4.354) 35.488,3.5 37.1,3.5 ccw(c37.1,4.75) 38.35,4.75 v2(38.35,6.5) ; v2(39.9,8.1) 46.5,8.1 48.2,9.8 48.2,13.68 44.88,17 43.439,17 42.738,17.702 R24.1
  Bottom Layer w0.2: v2(38.35,6.5) 38.4,6.5 39.9,8 v2(39.9,8.1)
RESET: DD1.29 R32.2 X6.5 | length 46.1
  Top Layer w0.2: v2(22.3,2.8) 22.3,6.12 22.705,6.525 DD1.29
  Top Layer w0.3: X6.5 43.697,10.173 R32.2 v2(45.9,9.375)
  Bottom Layer w0.2: v2(22.3,2.8) 22.3,1.7 23.575,0.425 47.406,0.425 48.341,1.361 v2(48.341,6.987) 45.953,9.375 v2(45.9,9.375)
RX: DD1.30 R9.2 | length 42.5
  Top Layer w0.2: DD1.30 28.368,5.725 cw(c28.368,3.185) 30.164,4.981 32.301,2.844 ccw(c34.097,4.64) 34.097,2.1 v2(35.4,2.1) ; v2(36.963,1.25) ccw(c37.928,2.216) 37.928,0.85 45.451,0.85 ccw(c45.451,3.39) 47.247,1.594 48.906,3.253 ccw(c47.11,5.049) 49.65,5.049 49.65,16.3 cw(c50.25,16.3) 50.25,16.9 R9.2@51.1,16.9
  Bottom Layer w0.2: v2(35.4,2.1) cw(c35.4,0.379) 36.617,1.596 v2(36.963,1.25)
SCK: DD1.17 X6.3 | length 10.5
  Top Layer w0.2: DD1.17 31.487,11.125 32.383,12.021 39.31,12.021 X6.3
SCL: DD1.28 R30.1 | length 20.7
  Top Layer w0.2: R30.1 7.8,15.9 cw(c7.8,15.054) 8.398,15.652 12.421,11.629 cw(c10.799,10.007) v2(13.093,10.007) ; v2(14.226,8.874) v2(20.7,8.874) ; v2@22.264,7.325 DD1.28
  Bottom Layer w0.2: v2(13.093,10.007) v2(14.226,8.874) ; v2(20.7,8.874) v2(22.256,7.317)
SDA: DD1.27 R31.1 | length 18.7
  Top Layer w0.2: R31.1 7.536,13.125 cw(c7.536,10.585) 9.332,12.381 v2(12.409,9.303) ; v2(13.582,8.125) DD1.27
  Bottom Layer w0.2: v2(12.409,9.303) 12.406,9.3 v2(13.582,8.125)
SIG1: DD1.23 R16.2 | length 22
  Top Layer w0.2: v2(15.189,11.033) 13.031,8.875 ccw(c14.007,7.9) 12.627,7.9 12.627,7.775 ccw(c13.3,7.775) 13.3,7.103 15.127,7.103 cw(c15.127,6.623) 15.607,6.623 R16.2@15.607,5.8 ; v2(17.3,13.1) ccw(c18.349,14.149) 18.349,12.665 25.672,12.665 cw(c25.672,12.125) 26.212,12.125 DD1.23
  Bottom Layer w0.2: v2(15.189,11.033) 15.233,11.033 v2(17.3,13.1)
SIG1_LED: DD1.32 VD2.2 | length 14.3
  Top Layer w0.2: DD1.32@24,4.113 DD1.32
  Top Layer w0.3: VD2.2@19.475,7.152 cw(c19.647,7.152) VD2.2@19.647,7.325 ; VD2.2 18.4,7.252 ccw(c18.4,6.6) 17.747,6.6 17.747,3.552 ccw(c19.799,3.552) 19.799,1.5 21.5,1.5 ccw(c21.5,4.012) DD1.32@24.012,4.012
SIG2: DD1.12 R20.2 | length 10.1
  Top Layer w0.2: DD1.12 33.798,6.525 35.28,8.007 37.802,8.007 40.009,5.8 R20.2
SIG2_LED: DD1.11 VD3.2 | length 5.2
  Top Layer w0.3: DD1.11 34.154,5.725 35.681,7.252 VD3.2
TX: DD1.31 R10.2 | length 41.9
  Top Layer w0.2: DD1.31 25.075,4.925 25.367,4.633 25.367,4.064 24.4,3.097 24.4,1.241 25.191,0.45 46.7,0.45 50.075,3.825 50.075,9.53 50.06,9.544 50.06,11.885 50.294,12.119 R10.2
UGND: VD1.2 VT1.3 X1.4
  other v3: 27.524,39.6 28.599,39.6 31.922,39.6 27.538,40.7 28.612,40.7 31.935,40.7 27.438,41.8 28.512,41.8 29.587,41.8 30.661,41.8 31.935,41.8 27.477,42.99 28.551,42.99 29.626,42.99 30.7,42.99 31.974,42.99
pads on no net: DA2.2 DA2.4 DA2.7 DA2.12 DA2.14 DA2.17 DA2.22 DA2.24 DA2.29 DA4.2 DA4.4 DA4.7 DA4.12 DA4.14 DA4.17 DA4.22 DA4.24 DA4.29 DD1.1 X3.2 X4.2

## Polygon pours and split planes (outlines as drawn)
12B on Top Layer "Top Signal Layer-No Net" (solid, remove dead copper, pour order 6): 13.083,47 14.95,47 15.9,47 cw(c15.9,46.4) 16.5,46.4 16.5,44.65 cw(c15.95,44.65) 15.95,44.1 14.95,44.1 14.95,41.5 13.971,41.5 13.971,44.1 13.073,44.1 cw(c13.073,44.657) 12.516,44.657 12.516,46.433 cw(c13.083,46.433)
UGND on Top Layer "Top Signal Layer-No Net" (solid, remove dead copper, pour order 62): 32.6,49.991 32.6,55.4 ccw(c31.501,55.4) 31.501,56.5 27.2,56.5 ccw(c27.2,55.165) 25.865,55.165 25.865,49.5 25.865,39.635 ccw(c26.8,39.635) 26.8,38.7 31.774,38.7 ccw(c31.774,39.526) 32.6,39.526
NetDA2_1 on Top Layer "Top Signal Layer-No Net" (solid, remove dead copper, pour order 3): 17.982,55.269 17.985,49.923 cw(c17.039,49.923) 17.039,48.977 9.76,48.977 ccw(c9.76,47.739) 8.523,47.739 8.523,40.547 ccw(c9.37,40.547) 9.37,39.7 11.266,39.7 ccw(c11.266,40.484) 12.05,40.484 12.05,43.5 14.05,43.5 14.05,34.75 cw(c12.801,34.749) 12.8,33.5 8.523,33.5 ccw(c8.523,32.727) 7.75,32.727 7.75,23.487 2.043,23.487 cw(c2.043,24.53) 1,24.53 1,49.198 cw(c2.24,49.198) 2.24,50.438 3.438,50.438 ccw(c3.438,53) 6,53 6,54.989 cw(c7.511,54.989) 7.511,56.5 16.75,56.5 cw(c16.75,55.269)
NetDA2_15 on Top Layer "Top Signal Layer-No Net" (solid, remove dead copper, pour order 4): 15.762,33.494 20.556,33.494 cw(c20.556,33) 21.05,33 21.05,23.487 23.5,23.487 24.403,23.487 ccw(c24.403,24.533) 25.45,24.533 25.45,30.418 25.45,49.249 25.45,55.25 ccw(c24.2,55.25) 24.199,56.501 19.75,56.501 ccw(c19.75,55.234) 18.483,55.234 18.483,49.967 ccw(c19.45,49.967) 19.45,49 cw(c19.45,48.187) 20.263,48.187 20.263,40.222 cw(c19.941,40.222) 19.94,39.9 17.225,39.9 cw(c17.225,40.275) 16.85,40.275 16.85,43.75 15.95,43.75 15.95,41.175 15.177,41.175 ccw(c15.177,40.698) 14.7,40.698 14.7,34.557 ccw(c15.762,34.556)
PGND on Top Layer "Top Signal Layer-No Net" (solid, remove dead copper, pour order 1): 17.101,40.476 17.101,43.928 17.101,46.799 ccw(c16.4,46.799) 16.4,47.5 12.493,47.5 ccw(c12.493,46.807) 11.8,46.807 11.8,40.486 cw(c11.414,40.486) 11.414,40.1 9.409,40.1 cw(c9.408,40.482) 9.027,40.482 9.027,47.427 cw(c10.151,47.427) 10.151,48.551 18.774,48.551 cw(c18.774,47.423) 19.902,47.423 19.902,40.492 cw(c19.51,40.492) 19.51,40.1 17.477,40.1 cw(c17.477,40.476)
12B on Top Layer "Top Signal Layer-No Net" (solid, remove dead copper, pour order 18): 8.05,32.278 8.05,23.5 20.75,23.5 20.75,32.428 ccw(c20.078,32.428) 20.078,33.1 8.872,33.1 ccw(c8.872,32.278)
NetDA4_1 on Top Layer "Top Signal Layer-No Net" (solid, remove dead copper, pour order 28): 38.497,55.395 38.5,49.986 cw(c37.493,49.985) 37.492,48.977 ccw(c37.492,48.32) 36.836,48.32 36.836,39.899 40.35,39.899 40.35,43.499 42.35,43.499 42.35,34.749 cw(c41.101,34.748) 41.1,33.499 36.977,33.499 ccw(c36.977,32.722) 36.2,32.722 36.2,23.485 34.92,23.485 34.191,23.485 cw(c34.191,24.514) 33.162,24.514 33.162,30.465 33.162,56.5 37.392,56.5 cw(c37.392,55.395)
NetDA4_15 on Top Layer "Top Signal Layer-No Net" (solid, remove dead copper, pour order 30): 44.207,33.493 48.823,33.493 cw(c48.823,32.966) 49.35,32.966 49.35,23.485 54.7,23.485 ccw(c54.7,24.785) 56,24.786 56,49.156 ccw(c54.685,49.156) 54.685,50.472 53.226,50.473 cw(c53.228,53.221) 50.48,53.221 50.48,55.315 ccw(c49.295,55.315) 49.295,56.5 40.219,56.5 ccw(c40.219,55.259) 38.978,55.259 38.978,49.998 ccw(c39.82,49.998) 39.82,49.156 47.563,49.156 cw(c47.563,48.119) 48.6,48.119 48.6,40.3 cw(c48.199,40.3) 48.199,39.899 45.525,39.899 cw(c45.525,40.279) 45.145,40.279 45.145,43.749 44.25,43.749 44.25,41.174 43.574,41.174 ccw(c43.574,40.6) 43,40.6 43,34.7 ccw(c44.207,34.7)
PGND on Top Layer "Top Signal Layer-No Net" (solid, remove dead copper, pour order 0): 45.401,40.475 45.401,43.927 45.401,46.798 ccw(c44.7,46.798) 44.7,47.499 40.793,47.499 ccw(c40.793,46.806) 40.1,46.806 40.1,40.485 cw(c39.714,40.485) 39.714,40.099 37.708,40.099 cw(c37.708,40.481) 37.327,40.481 37.327,47.425 cw(c38.451,47.425) 38.451,48.55 47.074,48.55 cw(c47.074,47.421) 48.202,47.421 48.202,40.491 cw(c47.81,40.491) 47.81,40.099 45.777,40.099 cw(c45.777,40.475)
12B on Top Layer "Top Signal Layer-No Net" (solid, remove dead copper, pour order 70): 41.383,46.999 43.25,46.999 44.2,46.999 cw(c44.2,46.399) 44.8,46.399 44.8,44.649 cw(c44.25,44.649) 44.25,44.099 43.25,44.099 43.25,41.499 42.271,41.499 42.271,44.099 41.373,44.099 cw(c41.373,44.655) 40.816,44.655 40.816,46.431 cw(c41.383,46.431)
12B on Top Layer "Top Signal Layer-No Net" (solid, remove dead copper, pour order 34): 36.455,32.376 36.455,23.499 49.05,23.499 49.05,32.378 ccw(c48.329,32.378) 48.329,33.099 37.178,33.099 ccw(c37.178,32.376)
12B on Top Layer "Top Signal Layer-No Net" (solid, remove dead copper, pour order 32): 32.392,28.907 26.317,28.907 ccw(c26.317,28.491) 25.901,28.491 25.901,26.547 25.901,21.799 ccw(c26.398,21.799) 26.398,21.302 26.85,21.302 ccw(c26.85,22.352) 27.9,22.352 27.9,26.648 32.41,26.648 ccw(c32.41,27.038) 32.8,27.038 32.8,28.5 ccw(c32.393,28.5)
5B on Top Layer "Top Signal Layer-No Net" (solid, remove dead copper, pour order 42): 23.7,16.987 23.7,16.482 ccw(c24.272,16.482) 24.272,15.91 27.717,15.91 cw(c27.717,15.127) 28.5,15.127 28.5,14.4 ccw(c29.1,14.4) 29.1,13.8 29.387,13.8 cw(c29.387,13.187) 30,13.187 30,12.9 ccw(c30.5,12.9) 30.5,12.4 39.31,12.4 39.31,15.5 ccw(c38.41,15.5) 38.41,16.4 36.5,16.4 cw(c36.5,17.255) 35.645,17.255 35.645,20.994 ccw(c33.321,20.994) 33.321,23.319 29.7,23.319 29.7,21.805 ccw(c30.419,21.805) 29.911,21.297 30.627,20.58 ccw(c31.545,21.499) 31.545,20.2 33.4,20.2 cw(c33.4,19.71) 33.891,19.709 33.891,18.304 cw(c33.262,18.304) 33.262,17.675 24.387,17.675 ccw(c24.387,16.988)
PGND on Top Layer "Top Signal Layer-No Net" (solid, remove dead copper, pour order 72): 31.985,26.139 31.985,23.799 29.499,23.799 ccw(c29.499,23.3) 29,23.3 29,19.9 33.192,19.9 cw(c33.192,19.492) 33.6,19.492 33.6,18.5 cw(c33.1,18.5) 33.1,18 28.2,18 cw(c28.2,18.606) 27.594,18.606 27.594,20.852 cw(c27.935,20.852) 27.694,21.094 28.2,21.6 28.2,26.139
12B on Bottom Layer "Top Signal Layer-No Net" (solid, remove dead copper, pour order 14): 23.65,53.4 23.65,50.6 cw(c23.05,50.6) 23.05,50 13.231,50 ccw(c13.231,48.861) 12.092,48.861 12.092,43.5 12.092,26.908 ccw(c12.729,26.908) 12.73,26.27 16.05,26.27 31.5,26.275 31.5,28.888 17.446,28.888 cw(c17.446,29.633) 16.7,29.633 16.7,46.632 cw(c17.568,46.632) 17.568,47.5 18.75,47.5 27.813,47.5 39.839,47.5 cw(c39.839,46.339) 41,46.339 41,43.5 41,29.55 cw(c40.338,29.55) 40.338,28.888 31.5,28.888 31.5,27.8 31.5,26.275 36.518,26.272 40.73,26.27 42.675,26.27 44.914,26.264 ccw(c44.916,26.864) 45.516,26.864 45.516,43.5 45.516,48.578 ccw(c44.095,48.578) 44.094,50 28.426,50 cw(c28.425,50.613) 27.812,50.613 27.812,53.438 ccw(c27.25,53.438) 27.25,54 24.25,54 ccw(c24.25,53.4)
UGND on Bottom Layer "Top Signal Layer-No Net" (solid, remove dead copper, pour order 2): 26.851,43.596 32.104,43.596 cw(c32.104,42.7) 33,42.7 33,40.308 33,38.93 cw(c32.37,38.93) 32.37,38.3 27.55,38.3 cw(c27.55,38.999) 26.851,38.999 26.851,40.349 ccw(c26.266,40.349) 26.266,40.934 22.525,40.934 cw(c22.525,41.408) 22.051,41.408 22.051,43.095 cw(c22.552,43.095) 22.553,43.596
PGND on Bottom Layer "Top Signal Layer-No Net" (solid, remove dead copper, pour order 16): 5.988,56.501 5.987,53.228 cw(c3.309,53.229) 3.309,50.55 0.038,50.55 0.037,44.2 0.038,29.4 20.7,29.4 ccw(c20.7,30.215) 21.515,30.215 21.515,43.181 cw(c22.234,43.181) 22.234,43.9 26.768,43.9 33.318,43.9 33.318,38 25.7,38 ccw(c25.7,37.2) 24.9,37.2 24.9,30.172 ccw(c25.672,30.172) 25.672,29.4 46,29.4 46,26.425 cw(c45.312,26.425) 45.311,25.736 39.714,25.736 29.017,25.736 22.955,25.736 12.264,25.736 cw(c12.264,26.404) 11.596,26.404 11.596,29.4 0.039,29.4 0.037,25.736 0.037,23.704 22.955,23.704 46,23.704 56.462,23.704 56.462,41.2 56.462,50.551 53.449,50.551 cw(c53.449,53.487) 50.512,53.488 50.513,56.5
DGND on Bottom Layer "Top Signal Layer-No Net" (solid, remove dead copper, pour order 38): 0.038,23.371 0.038,6.05 3.25,6.05 cw(c3.25,3.288) 6.012,3.288 6.012,0.075 27.6,0.075 43.806,0.075 50.5,0.076 50.5,3.3 cw(c53.25,3.3) 53.25,6.05 56.462,6.05 56.462,20.575 56.462,23.371 48.442,23.371

## Keep-outs
Keep-Out Layer:
  lines w0.1: 53.711,56.5 2.788,56.501 ccw(c2.788,53.75) 0.037,53.75 0.038,2.826 ccw(c2.788,2.826) 2.788,0.075 53.711,0.075 ccw(c53.711,2.826) 56.462,2.826 56.462,53.75 ccw(c53.711,53.75) 53.711,56.501

## Other copper
Top Layer:
  pour cut-out: 38.35,23.799 38.35,25.736 40.131,25.736 40.75,26.356 44.834,26.356 45.454,25.736 47.15,25.736 47.15,23.799
  pour cut-out: 10.05,23.8 10.05,25.738 11.831,25.738 12.45,26.357 16.534,26.357 17.154,25.738 18.85,25.738 18.85,23.8
Bottom Layer:
  pour cut-out: 48.075,0.076 56.462,0.076 56.462,7.175 48.075,7.175
  pour cut-out: 53.237,50.55 56.462,50.551 56.462,56.499 50.462,56.5 50.462,53.326 ccw(c53.238,53.326)
  pour cut-out: 5.988,53.275 5.987,56.5 0.038,56.5 0.037,50.5 3.212,50.5 ccw(c3.212,53.276)
  pour cut-out: 3.262,6.025 0.037,6.025 0.038,0.076 6.037,0.075 6.037,3.25 ccw(c3.262,3.25)

## Silkscreen, mask and mechanical layers (free items; w line width, h text height)
Top Overlay:
  circle w0.254: c29.5,36.075 r0.875
  circle w0.2: c3.262,3.275 r2.75
  circle w0.2: c53.262,3.301 r2.75
  circle w0.2: c53.237,53.3 r2.75
  circle w0.2: c3.238,53.275 r2.75
  region: 36,8.75 38.939,8.75 36,11.689
  lines w0.15: 0.175,9.3 1.433,9.3 ; 0.175,9.325 0.175,19.7 1.433,19.7 ; 0.175,17.4 1.433,17.4 ; 0.225,12.1 1.433,12.1 ; 0.225,14.751 1.433,14.751 ; 8.441,1.601 8.441,0.225 16.466,0.225 16.466,1.601 ; 11.531,0.225 11.531,1.601 ; 13.231,0.225 13.231,1.601 ; 40.183,1.601 40.183,0.225 48.208,0.225 48.208,1.601 ; 43.398,0.225 43.398,1.601 ; 45.523,0.225 45.523,1.601 ; 55.176,9.311 56.325,9.311 ; 55.176,19.711 56.325,19.711 56.325,17.361 ; 55.226,17.361 56.325,17.361 ; 55.276,12.308 56.325,12.308 ; 55.276,14.553 56.325,14.553 ; 56.325,9.336 56.325,17.361
  lines w0.2: 4.433,9.325 4.433,6.524 8.069,6.524 ; 4.508,19.7 4.508,22.5 8.144,22.5 8.132,22.489 8.132,19.7 ; 8.057,6.535 8.057,9.325
  lines w0.25: 12.944,46.175 44.135,46.175 44.15,46.19 44.15,47.575 ; 12.95,46.175 12.95,47.575 ; 18.35,46.295 18.35,47.575 ; 24.15,46.175 24.15,47.575 ; 24.35,47.575 28.45,47.575 28.45,46.175 ; 25.925,36.95 28.625,36.95 29.5,36.075 28.5,35.075 25.95,35.075 ; 28.15,36.95 29.6,36.95 ; 32.75,46.19 32.75,47.575 ; 35.25,45.6 35.3,45.6 ; 38.55,46.295 38.55,47.575 ; 25.65,27.95 31.775,27.95 31.775,38.625 25.65,38.625 25.65,27.95
  lines w0.254: 25.925,36.95 cw(c27.214,36.745) 28.462,37.126
  text "12B" at 27.2,47.339 h1.5 r180
  text "GND" at 31.6,47.339 h1.5 r180
  text "MTR1_A" at 17.7,47.325 h1.5 r180
  text "MTR1_B" at 23.2,47.325 h1.5 r180
  text "MTR2_A" at 37.9,47.325 h1.5 r180
  text "MTR2_B" at 43.5,47.325 h1.5 r180
  text "V.P." at 31.55,35.2 h1.52 r90
  text "BigBot" at 29.55,28.375 h2 r90
  text "v1.1 03.2019" at 30.85,28.35 h1.5 r90
  text "0,33мк" at 22.468,24.7 h1.5
  text "I2C" at 4.85,21.194 h1.4
  text "10к" at 6.494,21.172 h1.3
  text "5B" at 0.35,19.1 h1.5 r270
  text "47" at 49.878,18.6 h1.5 r90
  text "0,1мк" at 34.499,18.2 h1.5 r90
  text "5В" at 56.195,17.948 h1.3 r90
  text "SCL" at 0.35,17.063 h1.5 r270
  text "1к" at 10.465,17.008 h1.5 r90
  text "1к" at 12.864,17.008 h1.5 r90
  text "1к" at 15.372,17.008 h1.5 r90
  text "1к" at 20.55,17.008 h1.5 r90
  text "1к" at 38.715,17.008 h1.5 r90
  text "1к" at 41.218,17.008 h1.5 r90
  text "1к" at 43.748,17.008 h1.5 r90
  text "1к" at 48.713,17.008 h1.5 r90
  text "10к" at 17.996,16.339 h1.5 r90
  text "10к" at 46.313,16.125 h1.5 r90
  text "RX" at 56.185,15.516 h1.3 r90
  text "SDA" at 0.35,14.484 h1.5 r270
  text "47" at 9.124,14.5 h1.5
  text "0,1мк" at 21.25,13.5 h1.5
  text "TX" at 56.185,12.908 h1.3 r90
  text "SPI" at 36.25,12.737 h2 r90
  text "47" at 8.913,12.188 h1.5
  text "47" at 49.878,11.885 h1.5 r90
  text "GND" at 0.35,11.839 h1.5 r270
  text "10к" at 48.038,11.39 h1.5 r90
  text "GND" at 56.167,9.766 h1.3 r90
  text "SPI" at 40.25,8.25 h1.5
  text "10к" at 10.575,7.012 h1.5
  text "100" at 14.797,7.004 h1.5
  text "100" at 42.25,7.002 h1.5
  text "10к" at 46.67,7 h1.5
  text "I2C" at 4.69,6.85 h1.4
  text "10к" at 6.494,6.85 h1.3
  text "SIG_1" at 13.4,0.5 h1.5
  text "SIG_2" at 40.3,0.5 h1.5
  text "GND" at 45.759,0.472 h1.5
  text "GND" at 8.85,0.45 h1.5
Bottom Overlay:
  circle w0.254: c46.975,35.7 r0.875
  circle w0.2: c3.262,3.275 r2.75
  circle w0.2: c53.262,3.301 r2.75
  circle w0.2: c53.237,53.3 r2.75
  circle w0.2: c3.238,53.275 r2.75
  region: 11.599,25.7 11.599,38.775 2,38.775 2,25.7
  lines w0.2: 19.03,13.436 19.03,10.916 23.501,10.916 ; 23.534,10.949 23.534,13.525 ; 32.225,6.5 32.225,6.85 32.397,7.022 ; 32.851,18.63 32.851,21.207 ; 32.884,21.239 37.356,21.239 37.356,18.72
  lines w0.25: 46.1,35.6 46.1,37.05 ; 46.1,39.55 46.1,36.575 46.975,35.7 47.975,36.7 47.975,39.525 ; 44.425,33.275 44.425,40.075 55.1,40.075 55.1,33.25 44.45,33.25 44.425,33.275
  lines w0.254: 45.924,37.013 cw(c46.305,38.261) 46.1,39.55
  text "BigBot" at 54.7,35.225 h2
  text "v1.0 01.2019" at 54.575,33.825 h1.5
  text "100к" at 24.076,33.575 h1.5 r90
  text "V.P." at 47.85,33.575 h1.52
  text "2,2мк" at 43.117,32.767 h1.5
  text "2,2мк" at 19.417,32.7 h1.5
  text "3,3к" at 38.063,21.725 h1.5 r270
  text "1,5к" at 23.063,21.651 h1.5
  text "1,5к" at 44.835,21.511 h1.5
  text "0,1мк" at 28.453,20.815 h1.5
  text "3,3к" at 13.263,18.25 h1.5 r270
  text "10к" at 22.175,17.475 h1.5 r270
  text "0,033мк" at 20.928,17.225 h1.5
  text "0,033мк" at 48.725,17.161 h1.5
  text "1к" at 35.975,13.725 h1.5 r270
  text "1к" at 17.892,13.492 h1.5 r270
  text "10к" at 33.556,13.186 h1.5 r270
  text "0,1мк" at 28.618,10.34 h1.5
  text "0,1мк" at 35.268,8.19 h1.5
  text "LED" at 24.725,3.361 h1.5
  text "LED" at 36.211,3.336 h1.5
  text "390" at 36.225,2.273 h1.5
  text "0,1мк" at 28.543,2.212 h1.5
  text "390" at 24.65,2.16 h1.5